# Altium PCB S6-Exp-Bridge-Panel.PcbDoc
Units mm, origin at the board's own origin, x right, y up, seen from the top; angles counter-clockwise.
Board outline 98 x 98 mm, 2 copper layers (Top Layer, Bottom Layer); 4 components, 0 nets, 4 pads, 0 vias.
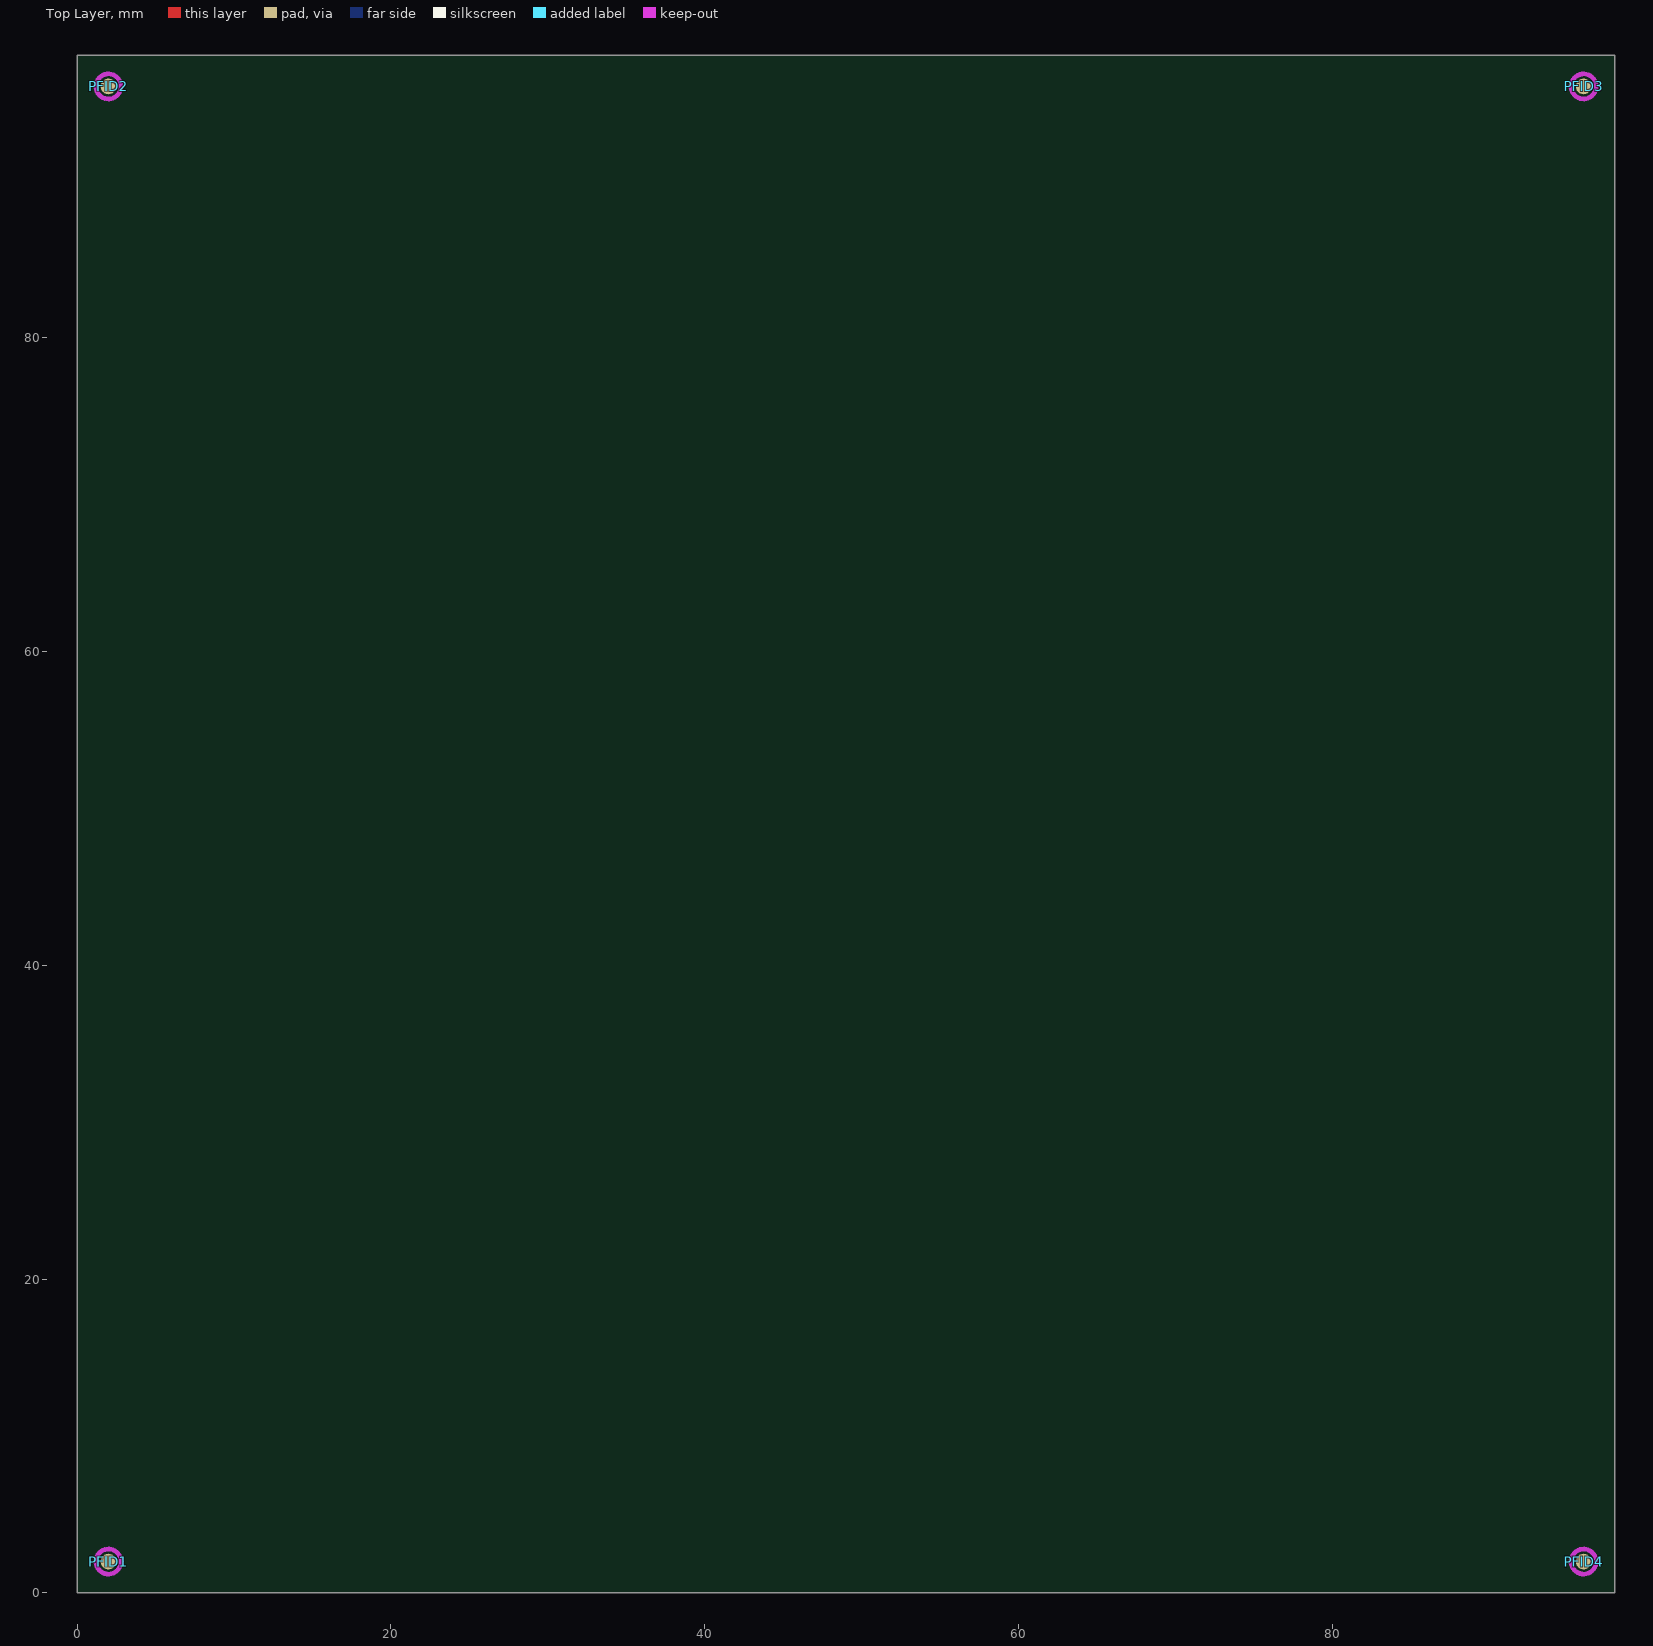
[diagram p0: Top Layer view]
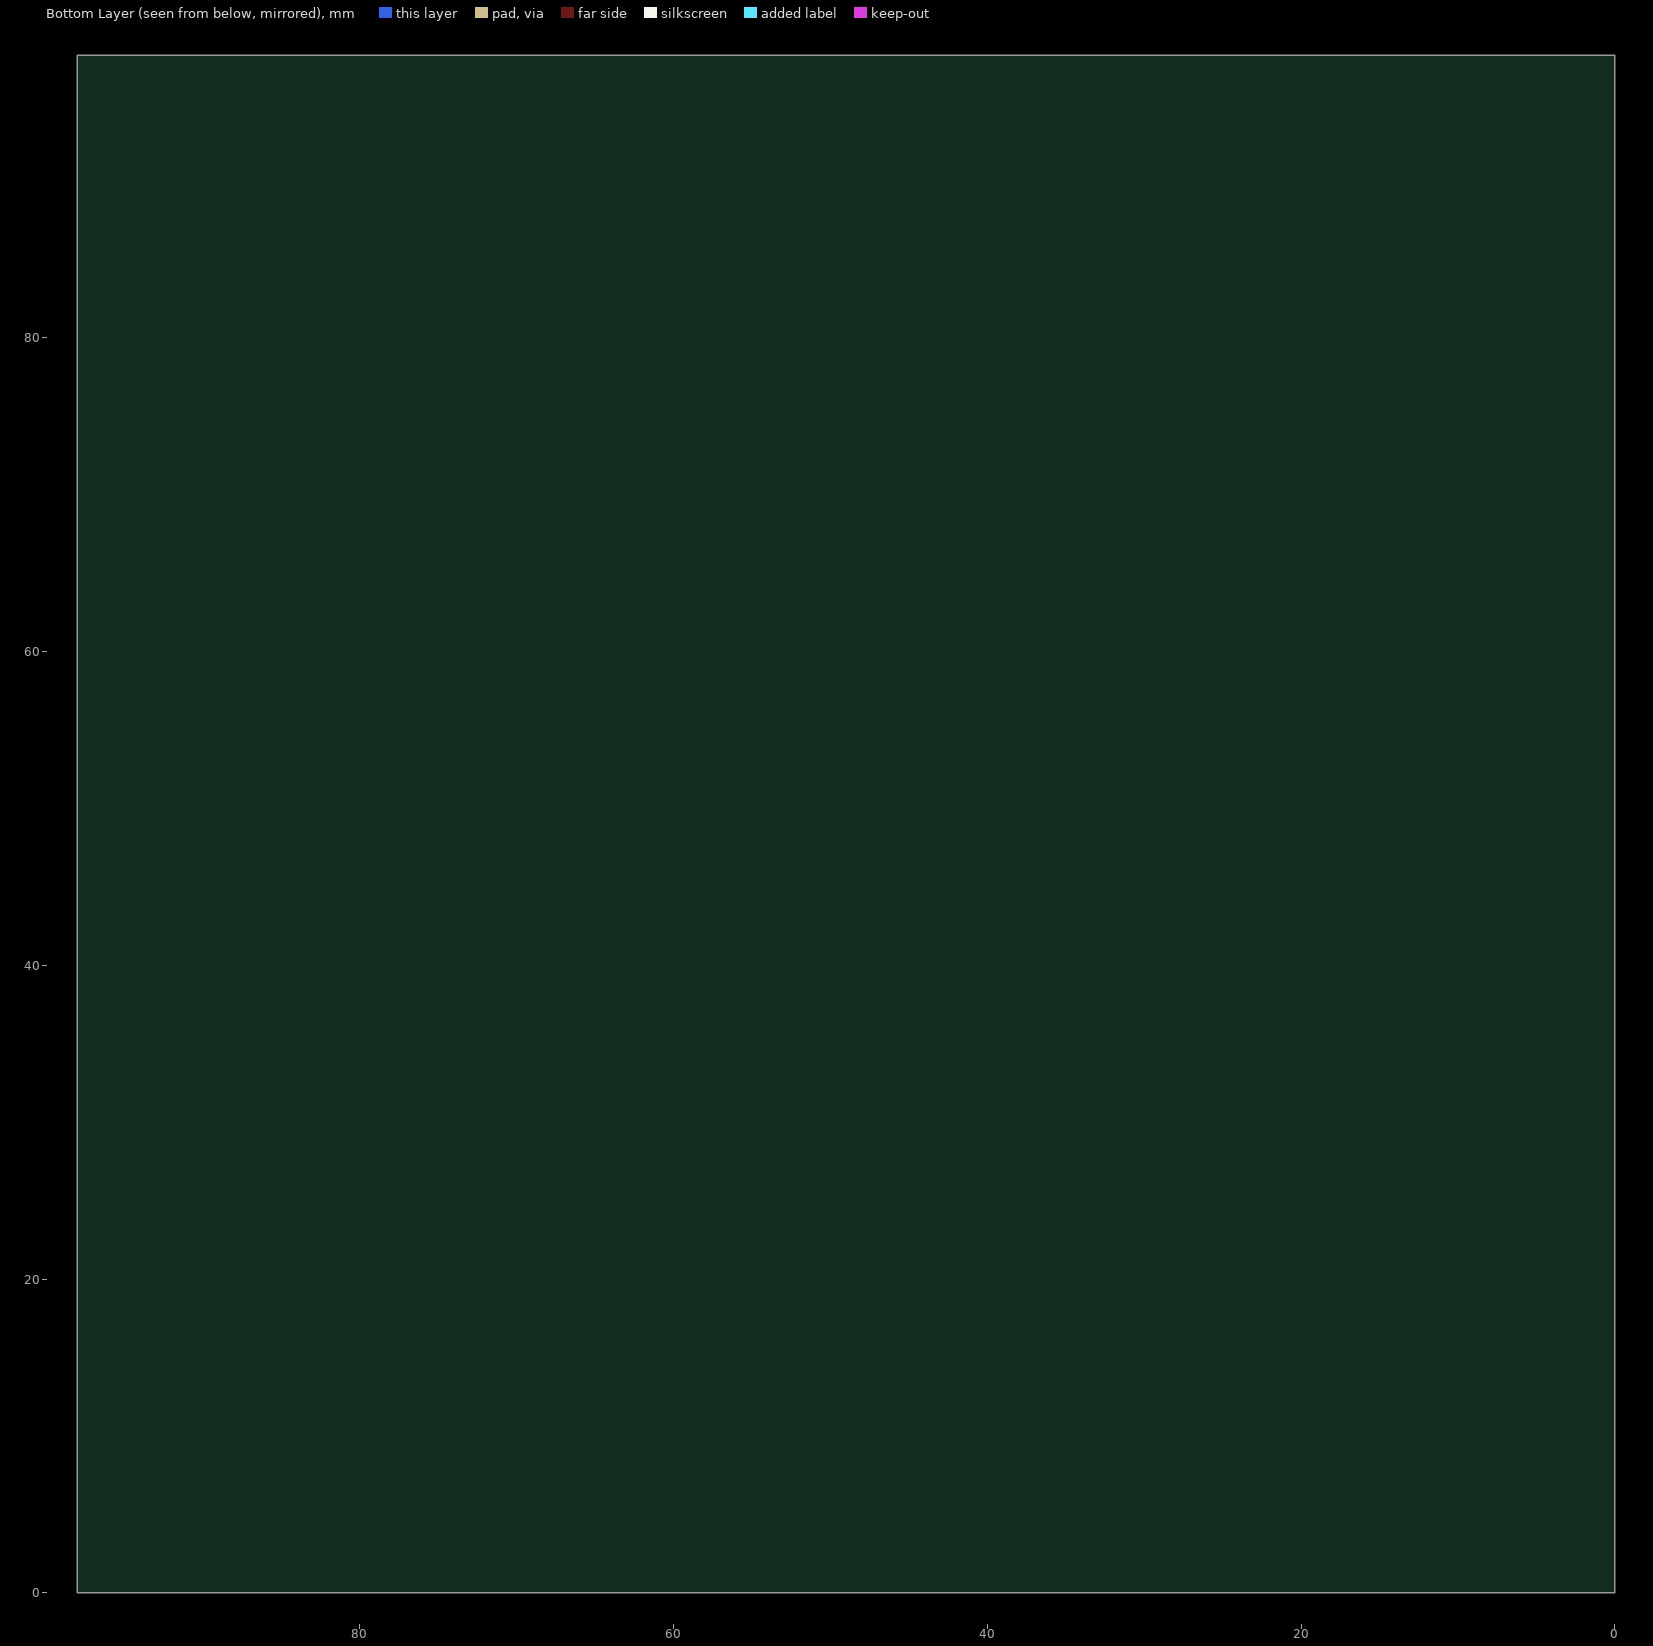
[diagram p1: Bottom Layer view, seen from below]

## Layer stack, top to bottom
Top Solder: solder mask 0.0102, Solder Resist, Dk 3.5
Top Layer: signal copper 0.0356
Dielectric 1: dielectric 0.32, FR-4, Dk 4.8
Bottom Layer: signal copper 0.0356
Bottom Solder: solder mask 0.0102, Solder Resist, Dk 3.5

## Board outline
0,0 0,98 98,98 98,0

## Design rules (kind name [scope] priority, off if disabled: settings)
Clearance [All] p1: gap=0.254 ignorepadtopadclearanceinfootprint=FALSE except(0: Arc-Hole Track-Hole SMDPad-Hole THPad-Hole Via-Hole Fill-Hole Poly-Hole Region-Hole Text-Hole)
PolygonConnect [All] p1: connectstyle=Relief reliefconductorwidth=0.254 reliefentries=4 polygonreliefangle="90 Angle" airgapwidth=0.254
RoutingVias [All] p1: holewidth=0.711 width=1.27 viastyle="Through Hole" minholewidth=0.711 minwidth=1.27 maxholewidth=0.711 maxwidth=1.27
SolderMaskExpansion [All] p1: expansion=0.102
Width [All] p1: maxlimit=0.254 minlimit=0.254 preferedwidth=0.254
30 further rules are at their usual default settings.

## Components (designator, comment, footprint, x,y, rotation, side; value= is the part's Value field where it differs from the comment)
PFID1 "Comment" FID12 2,2 r0 top
PFID2 "Comment" FID12 2,96 r0 top
PFID3 "Comment" FID12 96,96 r0 top
PFID4 "Comment" FID12 96,2 r0 top

## Footprints (in the part's own frame and the unit in brackets; to place one, negate y for a bottom-side part, rotate by r counter-clockwise, add the part's x,y. Pads: shape width x height; smd on the part's side, far side on the other; paste and mask are expansions set on the pad)
FID12 [mm] "Fiducial, 1mm, 2mm"
  round 1 smd paste-5 mask+0.5: 0(0,0)
  Top Layer keep-out circle w0.3: c0,0 r0.8

## Nets (pads, with @x,y where several pads share a name; then routed paths per layer and width w, separated by ;. In a path a pad name is that pad's centre, name@x,y a point inside that pad or via, vN(x,y) a via of type N, cw(c..) or ccw(c..) an arc to the next point about the centre after c; other vN are vias at no path point)
pads on no net: PFID1.0 PFID2.0 PFID3.0 PFID4.0

## Silkscreen, mask and mechanical layers (free items; w line width, h text height)
Mechanical 1:
  the board outline again, w0.01
V Cut:
  lines w0.203: 4,0 4,98 ; 47,0 47,98 ; 51,0 51,98 ; 94,0 94,98
  text "V Cut" at 5,102 h1.52 r90
  text "V Cut" at 48,102 h1.52 r90
  text "V Cut" at 52,102 h1.52 r90
  text "V Cut" at 95,102 h1.52 r90

## Panel: embedded boards
"S6-EXP-Bridge.PcbDoc" at 4,98, 2 rows x 5 columns, spacing 47 x 20, rotation 270